# Altium PCB STM32F103ZGT6核心板.PcbDoc
Units mm, origin at the board's own origin, x right, y up, seen from the top; angles counter-clockwise.
Board outline 50 x 50 mm, 2 copper layers (Top Layer, Bottom Layer); 32 components, 119 nets, 326 pads, 217 vias.
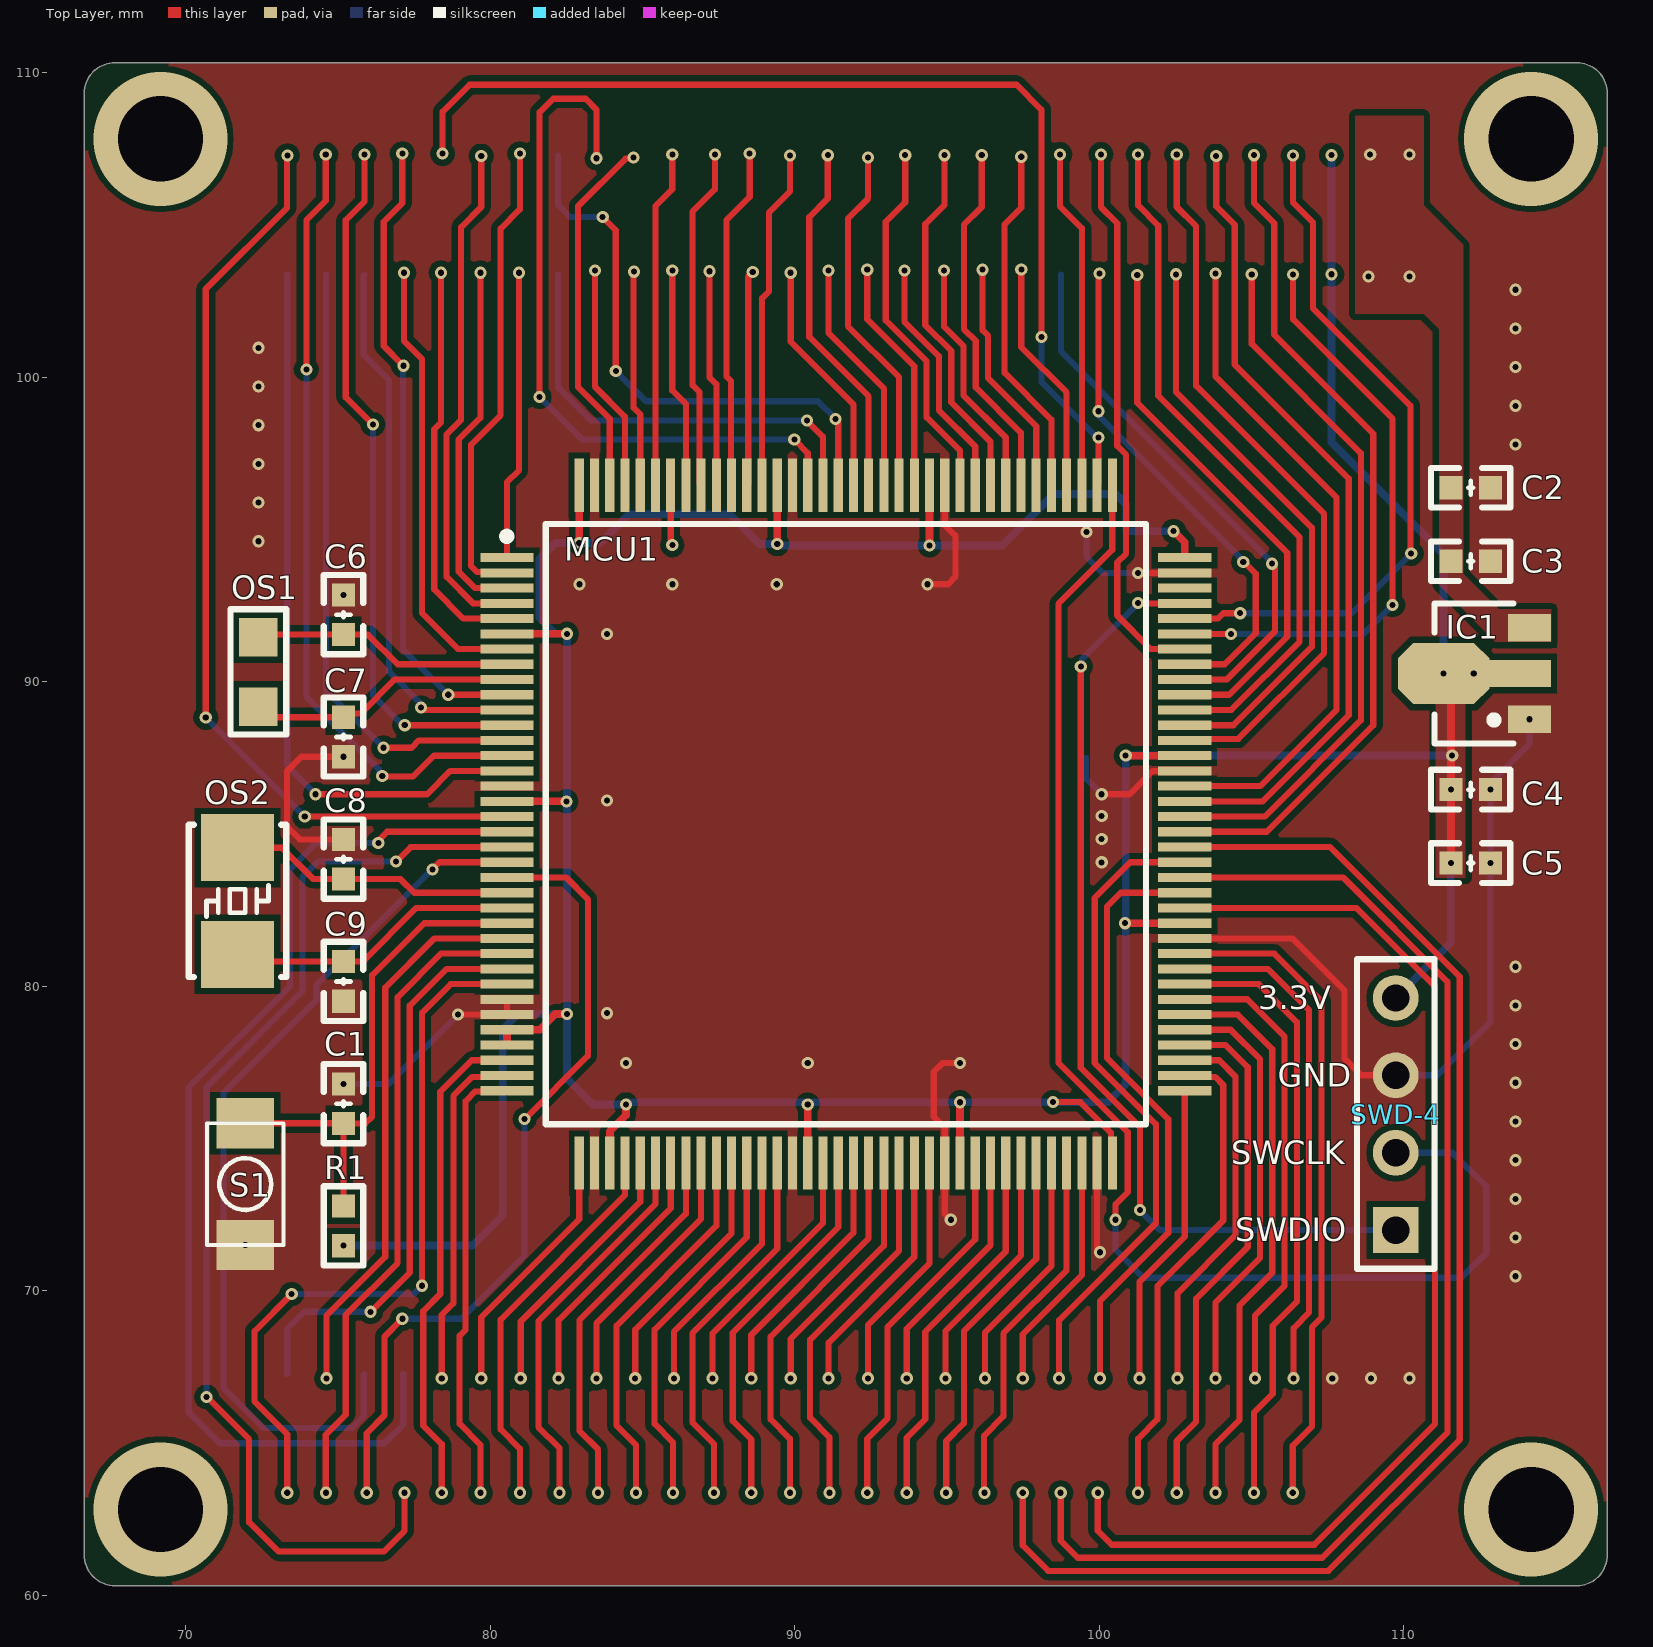
[diagram p0: Top Layer view]
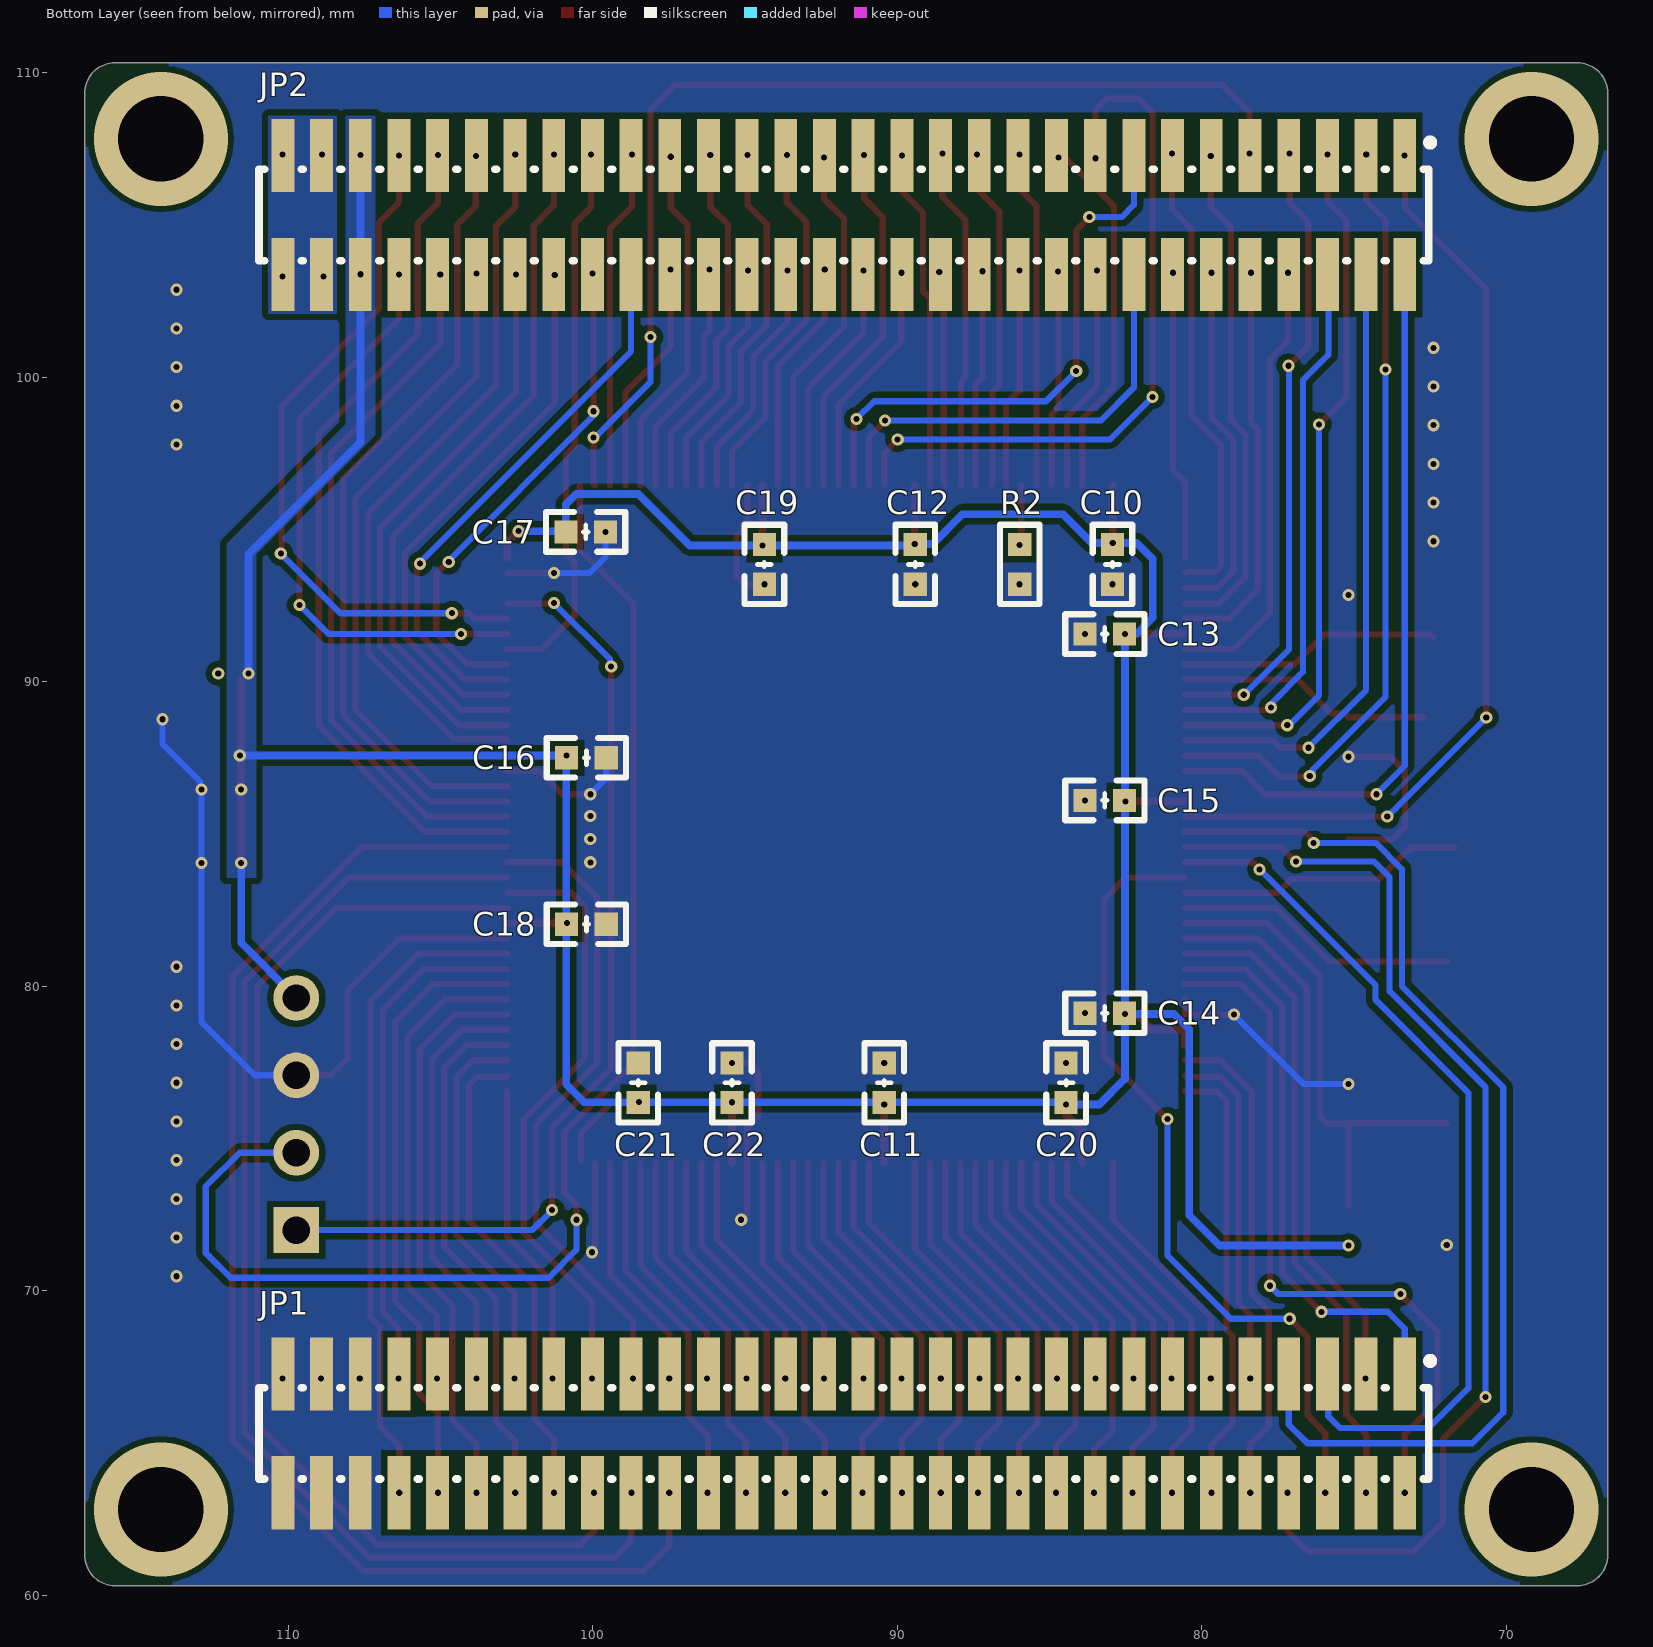
[diagram p1: Bottom Layer view, seen from below]
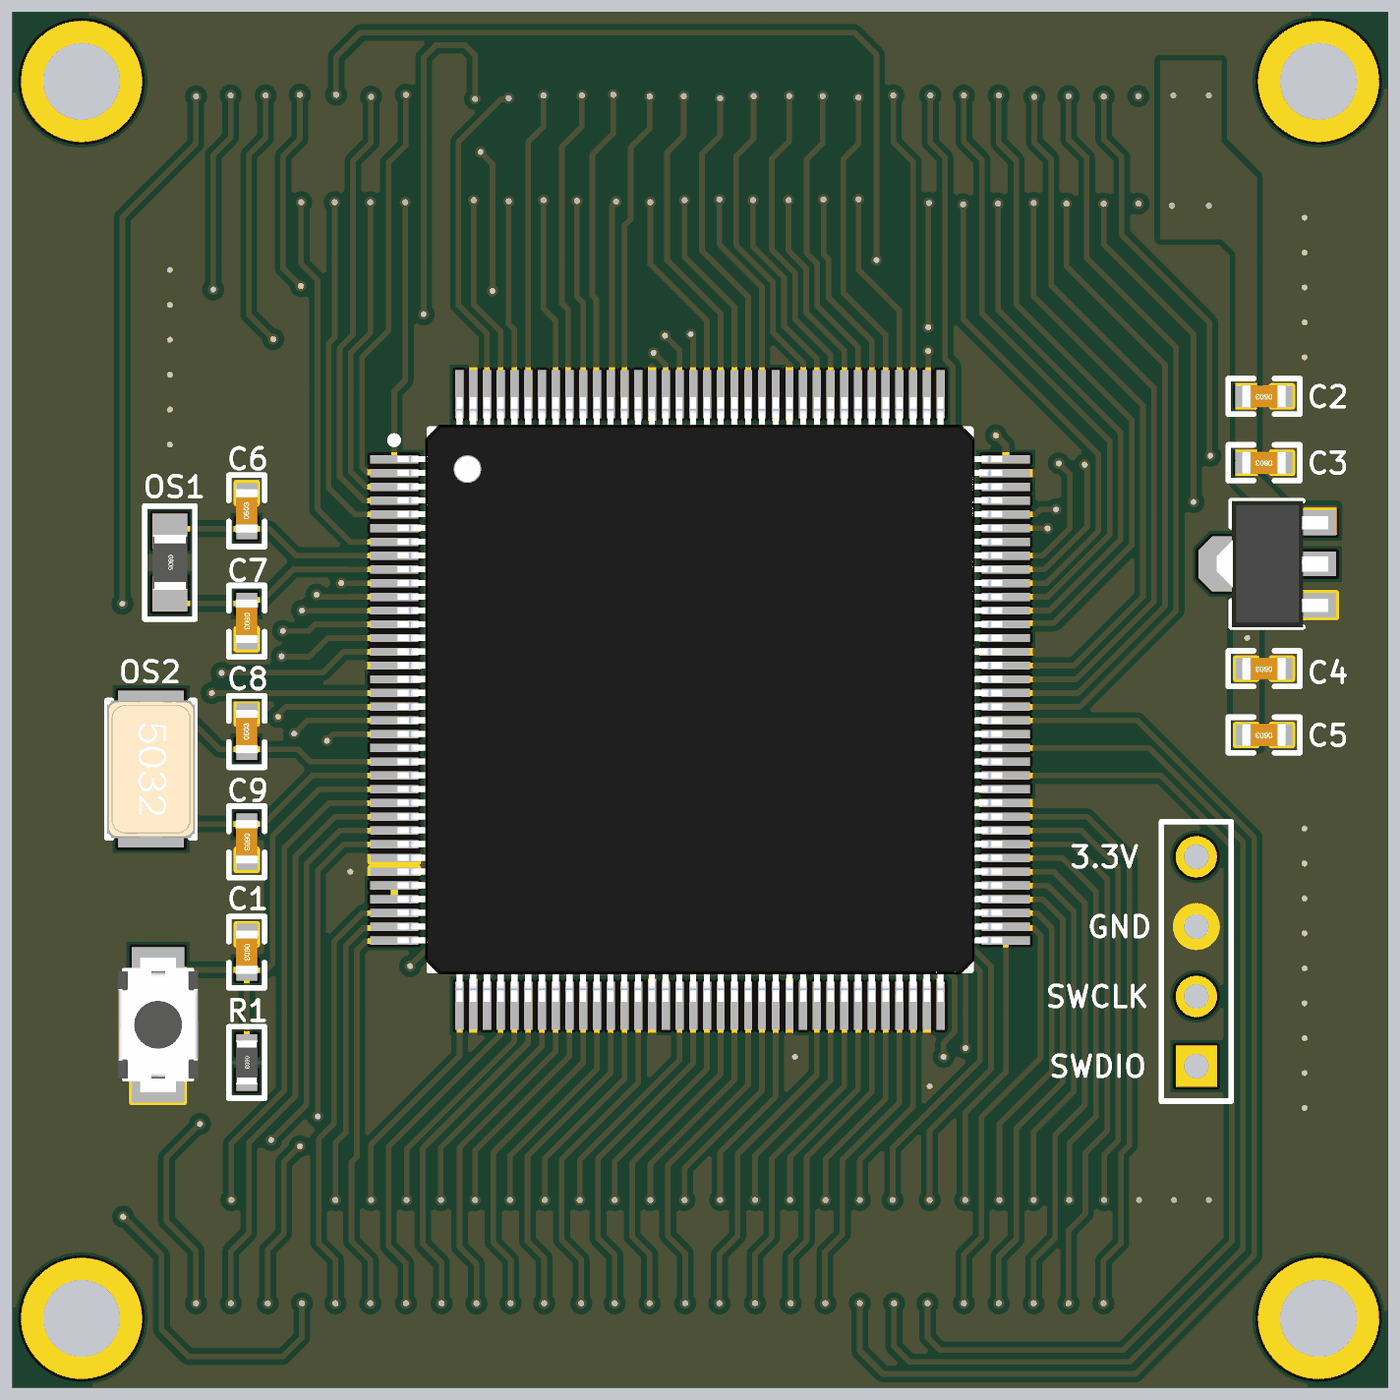
[diagram p2: 3D render of the assembled board from above, using the file's embedded part models]
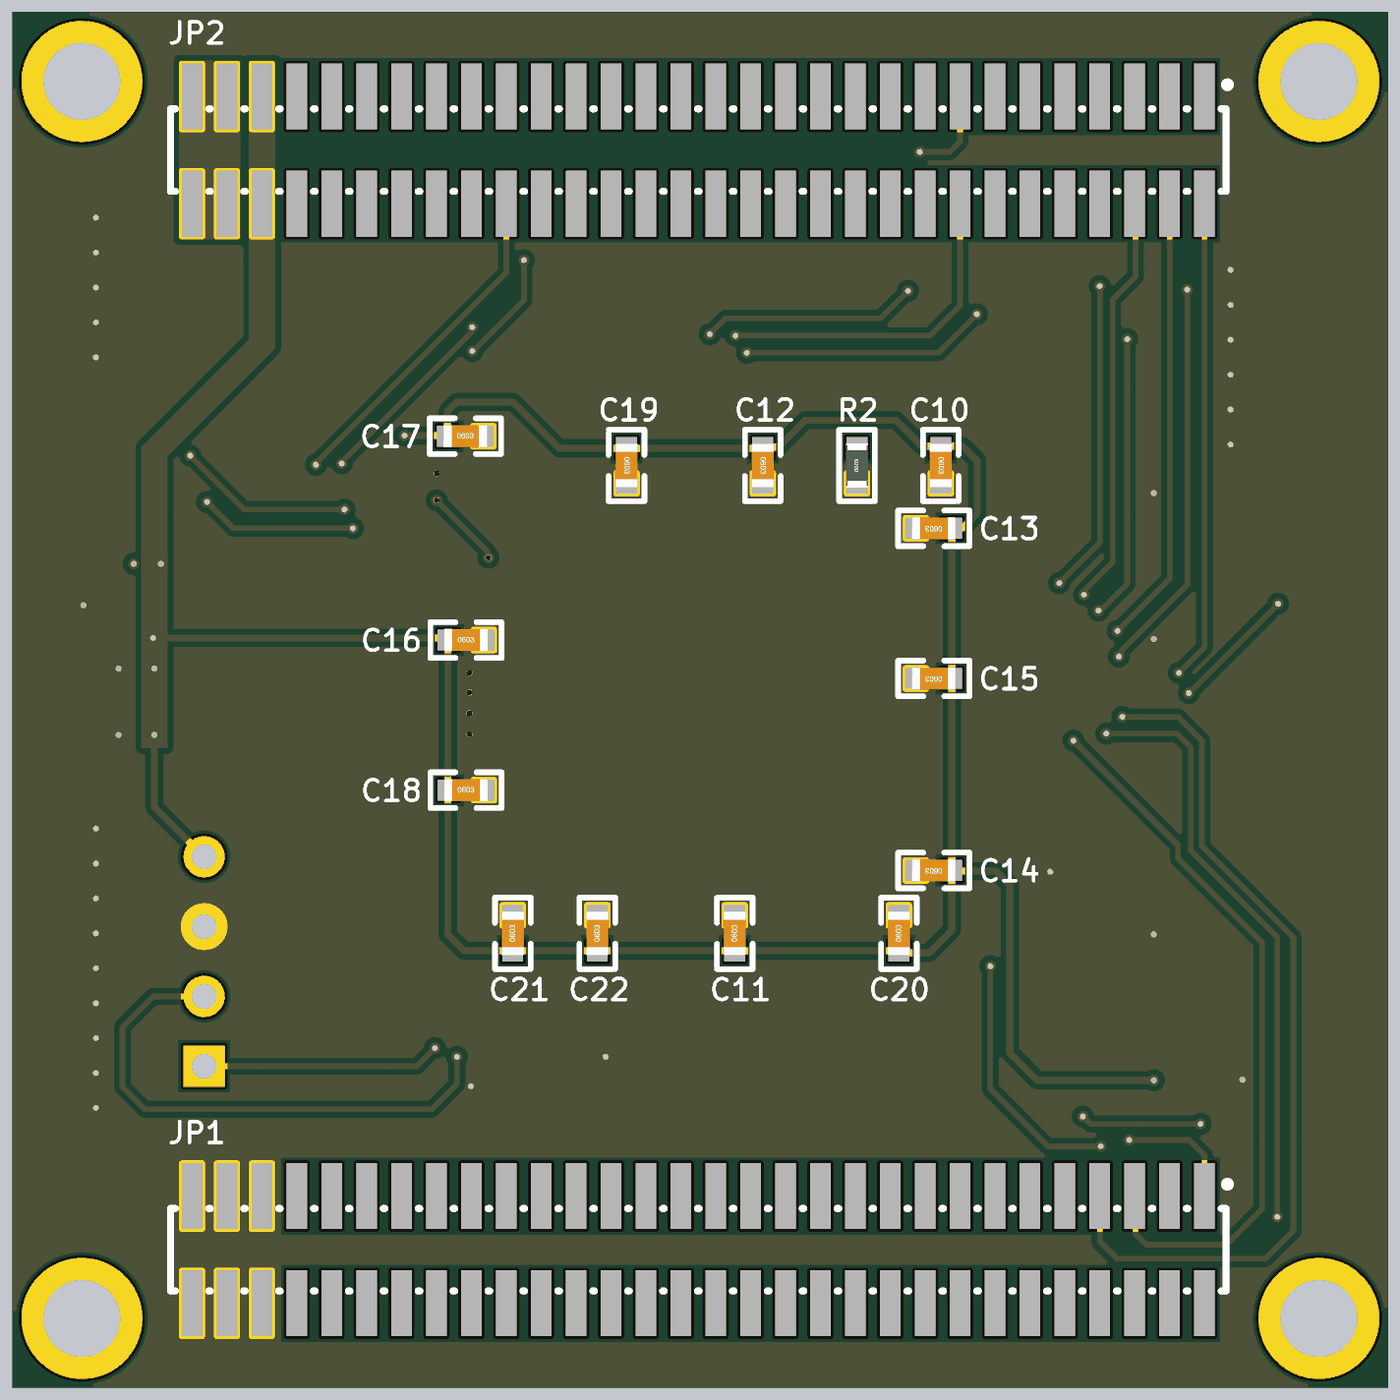
[diagram p3: 3D render of the assembled board from below, using the file's embedded part models]

## Layer stack, top to bottom
Top Solder: solder mask 0.0102, Solder Resist, Dk 3.5
Top Layer: signal copper 0.0356
Dielectric 1: dielectric 0.32, FR-4, Dk 4.8
Bottom Layer: signal copper 0.0356
Bottom Solder: solder mask 0.0102, Solder Resist, Dk 3.5

## Board outline
66.675,61.325 ccw(c67.675,61.325) 67.675,60.325 115.675,60.325 ccw(c115.675,61.325) 116.675,61.325 116.675,109.325 ccw(c115.675,109.325) 115.675,110.325 67.675,110.325 ccw(c67.675,109.325) 66.675,109.325

## Design rules (kind name [scope] priority, off if disabled: settings)
Clearance [All] p1: gap=0.2 ignorepadtopadclearanceinfootprint=FALSE
HoleSize [All] p1: absolutevalues=TRUE maxlimit=4 minlimit=0.025 maxpercent=80.000 minpercent=20.000
MinimumSolderMaskSliver [All] p1: minsoldermaskwidth=0.2
PolygonConnect [All] p1: connectstyle=Direct reliefconductorwidth=0.254 reliefentries=4 polygonreliefangle="90 Angle" airgapwidth=0.254
RoutingVias [All] p1: holewidth=0.711 width=1.27 viastyle="Through Hole" minholewidth=0.15 minwidth=0.25 maxholewidth=7.112 maxwidth=12.7
SilkToSilkClearance [All] p1 off: silktosilkclearance=0.254
SilkToSolderMaskClearance [IsPad] p1 off: minsilkscreentomaskgap=0.254 clearancetoexposedcopper=TRUE
SolderMaskExpansion [All] p1: expansion=0.102 istentingtop=FALSE
Width [All] p1: maxlimit=0.254 minlimit=0.203 preferedwidth=0.203
26 further rules are at their usual default settings.

## Components (designator, comment, footprint, x,y, rotation, side; value= is the part's Value field where it differs from the comment)
C1 "104" "C 0603_L" 75.184,76.149 r270 top
C2 "10uF" "C 0603_L" 112.192,96.368 r180 top
C3 "104" "C 0603_L" 112.192,93.955 r180 top
C4 "104" "C 0603_L" 112.192,86.462 r180 top
C5 "10uF" "C 0603_L" 112.192,84.049 r180 top
C6 "104" "C 0603_L" 75.184,92.202 r90 top
C7 "104" "C 0603_L" 75.184,88.189 r270 top
C8 "104" "C 0603_L" 75.184,84.176 r90 top
C9 "104" "C 0603_L" 75.184,80.162 r270 top
C10 "104" "C 0603_L" 82.931,93.853 r270 bottom
C11 "104" "C 0603_L" 90.425,76.835 r90 bottom
C12 "104" "C 0603_L" 89.408,93.853 r270 bottom
C13 "104" "C 0603_L" 83.185,91.567 r0 bottom
C14 "104" "C 0603_L" 83.185,79.121 r0 bottom
C15 "104" "C 0603_L" 83.185,86.106 r0 bottom
C16 "104" "C 0603_L" 100.203,87.503 r180 bottom
C17 "104" "C 0603_L" 100.228,94.92 r180 bottom
C18 "104" "C 0603_L" 100.203,82.042 r180 bottom
C19 "104" "C 0603_L" 94.361,93.853 r270 bottom
C20 "104" "C 0603_L" 84.455,76.835 r90 bottom
C21 "104" "C 0603_L" 98.5,76.835 r90 bottom
C22 "104" "C 0603_L" 95.425,76.835 r90 bottom
IC1 "AMS1117" SOT89 111.938,90.272 r90 top
JP1 "Header 2X30" HDR-SMD_60P-P1.27-V-M-R2-C30-LS5.8 91.753,65.325 r0 bottom
JP2 "Header 2X30" HDR-SMD_60P-P1.27-V-M-R2-C30-LS5.8 91.753,105.325 r0 bottom
MCU1 "STM32F103ZET6" F-QFP20x20-G144/Z24N 91.675,85.325 r0 top
OS1 "32.768K" "R 0805_M" 72.39,90.322 r270 top
OS2 "8M" "OSC 5032-2P" 71.704,82.804 r270 top
R1 "10K" "R 0603_L" 75.184,72.136 r270 top
R2 "1K" "R 0603_L" 85.979,93.853 r90 bottom
S1 "KEY" SWT3*4 71.958,73.508 r90 top
SWD-4 "Header 4" HDR1X4 109.728,72 r90 top

## Footprints (in the part's own frame and the unit in brackets; to place one, negate y for a bottom-side part, rotate by r counter-clockwise, add the part's x,y. Pads: shape width x height; smd on the part's side, far side on the other; paste and mask are expansions set on the pad)
"C 0603_L" [mil] "无极性贴片电容                                       淘宝ID:黄晶宝石"
  rect 30x30 smd: 1(-25.59,0) 2(25.59,0)
  silkscreen extent -51,-26 51,26, body extent -31,-16 31,16, height 32
F-QFP20x20-G144/Z24N [mm] "QFP; 144 Leads; Body 20 x 20 mm; Pitch 0.5 mm"
  rect 1.75x0.3 smd: 1(-11.125,8.75) 2(-11.125,8.25) 3(-11.125,7.75) 4(-11.125,7.25) 5(-11.125,6.75) 6(-11.125,6.25) 7(-11.125,5.75) 8(-11.125,5.25) 9(-11.125,4.75) 10(-11.125,4.25) 11(-11.125,3.75) 12(-11.125,3.25) 13(-11.125,2.75) 14(-11.125,2.25) 15(-11.125,1.75) 16(-11.125,1.25) 17(-11.125,0.75) 18(-11.125,0.25) 19(-11.125,-0.25) 20(-11.125,-0.75) 21(-11.125,-1.25) 22(-11.125,-1.75) 23(-11.125,-2.25) 24(-11.125,-2.75) 25(-11.125,-3.25) 26(-11.125,-3.75) 27(-11.125,-4.25) 28(-11.125,-4.75) 29(-11.125,-5.25) 30(-11.125,-5.75) 31(-11.125,-6.25) 32(-11.125,-6.75) 33(-11.125,-7.25) 34(-11.125,-7.75) 35(-11.125,-8.25) 36(-11.125,-8.75) 73(11.125,-8.75) 74(11.125,-8.25) 75(11.125,-7.75) 76(11.125,-7.25) 77(11.125,-6.75) 78(11.125,-6.25) 79(11.125,-5.75) 80(11.125,-5.25) 81(11.125,-4.75) 82(11.125,-4.25) 83(11.125,-3.75) 84(11.125,-3.25) 85(11.125,-2.75) 86(11.125,-2.25) 87(11.125,-1.75) 88(11.125,-1.25) 89(11.125,-0.75) 90(11.125,-0.25) 91(11.125,0.25) 92(11.125,0.75) 93(11.125,1.25) 94(11.125,1.75) 95(11.125,2.25) 96(11.125,2.75) 97(11.125,3.25) 98(11.125,3.75) 99(11.125,4.25) 100(11.125,4.75) 101(11.125,5.25) 102(11.125,5.75) 103(11.125,6.25) 104(11.125,6.75) 105(11.125,7.25) 106(11.125,7.75) 107(11.125,8.25) 108(11.125,8.75)
  rect 0.3x1.75 smd: 37(-8.75,-11.125) 38(-8.25,-11.125) 39(-7.75,-11.125) 40(-7.25,-11.125) 41(-6.75,-11.125) 42(-6.25,-11.125) 43(-5.75,-11.125) 44(-5.25,-11.125) 45(-4.75,-11.125) 46(-4.25,-11.125) 47(-3.75,-11.125) 48(-3.25,-11.125) 49(-2.75,-11.125) 50(-2.25,-11.125) 51(-1.75,-11.125) 52(-1.25,-11.125) 53(-0.75,-11.125) 54(-0.25,-11.125) 55(0.25,-11.125) 56(0.75,-11.125) 57(1.25,-11.125) 58(1.75,-11.125) 59(2.25,-11.125) 60(2.75,-11.125) 61(3.25,-11.125) 62(3.75,-11.125) 63(4.25,-11.125) 64(4.75,-11.125) 65(5.25,-11.125) 66(5.75,-11.125) 67(6.25,-11.125) 68(6.75,-11.125) 69(7.25,-11.125) 70(7.75,-11.125) 71(8.25,-11.125) 72(8.75,-11.125) 109(8.75,11.125) 110(8.25,11.125) 111(7.75,11.125) 112(7.25,11.125) 113(6.75,11.125) 114(6.25,11.125) 115(5.75,11.125) 116(5.25,11.125) 117(4.75,11.125) 118(4.25,11.125) 119(3.75,11.125) 120(3.25,11.125) 121(2.75,11.125) 122(2.25,11.125) 123(1.75,11.125) 124(1.25,11.125) 125(0.75,11.125) 126(0.25,11.125) 127(-0.25,11.125) 128(-0.75,11.125) 129(-1.25,11.125) 130(-1.75,11.125) 131(-2.25,11.125) 132(-2.75,11.125) 133(-3.25,11.125) 134(-3.75,11.125) 135(-4.25,11.125) 136(-4.75,11.125) 137(-5.25,11.125) 138(-5.75,11.125) 139(-6.25,11.125) 140(-6.75,11.125) 141(-7.25,11.125) 142(-7.75,11.125) 143(-8.25,11.125) 144(-8.75,11.125)
  silkscreen extent -11.25,-9.85 9.85,9.85, body extent -11.01,-10.99 10.99,11.01, height 1.63
HDR1X4 [mm] "Connector; Header; 4 Position"
  rect 1.5x1.5 hole 0.9: 1(0,0)
  round 1.5 hole 0.9: 2(2.54,0) 3(5.08,0) 4(7.62,0)
  silkscreen extent -1.27,-1.27 8.89,1.27
HDR-SMD_60P-P1.27-V-M-R2-C30-LS5.8 [mm]
  rect 0.75x2.4 smd: 1(-18.415,-1.95) 2(-18.415,1.95) 3(-17.145,-1.95) 4(-17.145,1.95) 5(-15.875,-1.95) 6(-15.875,1.95) 7(-14.605,-1.95) 8(-14.605,1.95) 9(-13.335,-1.95) 10(-13.335,1.95) 11(-12.065,-1.95) 12(-12.065,1.95) 13(-10.795,-1.95) 14(-10.795,1.95) 15(-9.525,-1.95) 16(-9.525,1.95) 17(-8.255,-1.95) 18(-8.255,1.95) 19(-6.985,-1.95) 20(-6.985,1.95) 21(-5.715,-1.95) 22(-5.715,1.95) 23(-4.445,-1.95) 24(-4.445,1.95) 25(-3.175,-1.95) 26(-3.175,1.95) 27(-1.905,-1.95) 28(-1.905,1.95) 29(-0.635,-1.95) 30(-0.635,1.95) 31(0.635,-1.95) 32(0.635,1.95) 33(1.905,-1.95) 34(1.905,1.95) 35(3.175,-1.95) 36(3.175,1.95) 37(4.445,-1.95) 38(4.445,1.95) 39(5.715,-1.95) 40(5.715,1.95) 41(6.985,-1.95) 42(6.985,1.95) 43(8.255,-1.95) 44(8.255,1.95) 45(9.525,-1.95) 46(9.525,1.95) 47(10.795,-1.95) 48(10.795,1.95) 49(12.065,-1.95) 50(12.065,1.95) 51(13.335,-1.95) 52(13.335,1.95) 53(14.605,-1.95) 54(14.605,1.95) 55(15.875,-1.95) 56(15.875,1.95) 57(17.145,-1.95) 58(17.145,1.95) 59(18.415,-1.95) 60(18.415,1.95)
  silkscreen extent -19.35,-2.49 19.2,1.5
"OSC 5032-2P" [mm] "5mm*3.2mm*0.8mm(长*宽*高)                  淘宝ID:黄晶宝石"
  rect 2.2x2.4 smd: 1(-1.75,0) 2(1.75,0)
  silkscreen extent -2.5,-1.6 2.5,1.6, body extent -2.5,-1.6 2.5,1.6, height 0.86
"R 0603_L" [mil] "1/10W贴片电阻                 淘宝ID:黄晶宝石"
  rect 30x30 smd: 1(-25.59,0) 2(25.59,0)
  silkscreen extent -51,-26 51,26, body extent -31,-16 32,16, height 16
"R 0805_M" [mil] "1/8W贴片电阻"
  rect 50x50 smd: 1(-45,0) 2(45,0)
  silkscreen extent -81,-36 81,36, body extent -39,-25 39,25, height 20
SOT89 [mm] "SOT89, 3-Leads, Body 4.50x2.45mm, Pitch 1.50mm, Lead Span 4.1mm, IPC Medium Density"
  rect 0.9x1.4 smd: 1(-1.5,-2.181) 3(1.5,-2.181)
  oct 2x3 smd: 2(0,0.635)
  rect 0.9x3 smd: 2(0,-1.381)
  silkscreen extent -2.3,-1.66 2.3,0.94, body extent -2.3,-2.58 2.3,1.47, height 1.6
SWT3*4 [mm]
  rect 1.65x1.9 smd: 1(-2,0) 2(2,0)
  silkscreen extent -2,-1.25 2,1.25, body extent -2.45,-1.45 2.45,1.45, height 2

## Part data
C1 C2 C3 C4 C5 C6 C7 C8 C9: library part Cap1
C10 C11 C12 C13 C14 C15 C16 C17 C18 C19 C20 C21 C22: library part CAP, "Capacitor"
IC1: library part CJA1117
JP1 JP2: library part "Header 30X2", "30*2P接插件", BOM名称=20*2P接插件, 学习资源=https://shop463601444.taobao.com, 版权归属="封装库来自淘宝 ID：黄晶宝石"
OS1 OS2: library part 晶振
  OS1: vaule=32.768K
  OS2: vaule=8M
R1 R2: library part Res
SWD-4: "Header, 4-Pin", LatestRevisionDate=17-Jul-2002, LatestRevisionNote="Re-released for DXP Platform.", Publisher="Altium Limited"

## Via types
v1: diameter 0.4/0.4 (per signal layer), hole 0.2, Top Layer to Bottom Layer, 213 vias
v2: diameter 4.4, hole 2.8, Top Layer to Bottom Layer, 4 vias

## Nets (pads, with @x,y where several pads share a name; then routed paths per layer and width w, separated by ;. In a path a pad name is that pad's centre, name@x,y a point inside that pad or via, vN(x,y) a via of type N, cw(c..) or ccw(c..) an arc to the next point about the centre after c; other vN are vias at no path point)
3.3V: C4.2 C5.2 C10.1 C11.1 C12.1 C13.1 C14.1 C15.1 C16.1 C17.1 C18.1 C19.1 C20.1 C21.1 C22.1 IC1.2 JP2.55 JP2.56 MCU1.6 MCU1.17 MCU1.32 MCU1.33 MCU1.39 MCU1.52 MCU1.62 MCU1.72 MCU1.84 MCU1.95 MCU1.108 MCU1.121 MCU1.131 MCU1.144 R1.2 SWD-4.4 | length 152
  Top Layer w0.203: v1(98.476,76.2) 99.377,76.2 100.377,75.2 MCU1.72@100.377,74.248
  Top Layer w0.254: MCU1.33 MCU1.32 81.623,78.575 82.144,79.096 v1(82.525,79.096) ; MCU1.17 v1(82.505,86.075) ; MCU1.6 v1(82.517,91.575) ; v1(82.925,94.558) MCU1.144 ; MCU1.39 83.931,74.206 83.931,75.244 84.455,75.768 v1(84.455,76.124) ; v1(89.425,94.522) MCU1.131 ; MCU1.52 v1(90.425,76.123) ; v1(94.425,94.476) MCU1.121 ; MCU1.62 v1(95.425,76.197) ; v1(100.846,82.075) MCU1.84 ; v1(100.863,87.579) 100.868,87.575 MCU1.95 ; v1(102.438,94.945) 102.8,94.583 MCU1.108 ; C5.2 C4.2 IC1.2@111.542,90.033
  Bottom Layer w0.254: v1(75.18,71.49) 79.415,71.49 80.416,72.492 80.416,78.588 80.924,79.096 v1(82.525,79.096) ; v1(82.517,91.575) 82.136,91.575 81.61,92.1 81.61,94.031 82.138,94.558 v1(82.925,94.558) 83.611,94.558 84.557,95.504 87.859,95.504 88.841,94.522 v1(89.425,94.522) ; C13.1@82.525,91.567 v1(82.525,79.096) ; v1(84.455,76.124) 83.363,76.124 82.525,76.962 v1(82.525,79.096) ; C20.1@84.531,76.2 v1(98.476,76.2) 100.279,76.2 100.863,76.784 v1(100.863,87.579) v1(111.582,87.579) ; C12.1@89.471,94.476 v1(94.425,94.476) 96.813,94.476 98.501,96.164 100.533,96.164 100.878,95.819 C17.1 ; C17.1@100.904,94.945 v1(102.438,94.945) ; v1(107.62,107.29) 107.62,97.866 111.299,94.187 v1(111.299,90.276) ; SWD-4.4 111.538,81.43 v1(111.538,84.053)
  other v1: 111.538,86.466 112.291,90.276 107.623,103.379
5V: C2.2 C3.2 IC1.3 JP2.57 JP2.58 JP2.59 JP2.60
  other v1: 108.839,103.302 110.185,103.302 108.89,107.315 110.185,107.315
BOOT0: MCU1.138 R2.2 | length 1.8
  Top Layer w0.203: v1@85.925,94.669 MCU1.138
  other v1: 85.979,94.488
GND: C1.1 C2.1 C3.1 C4.1 C5.1 C6.2 C7.2 C8.2 C9.2 C10.2 C11.2 C12.2 C13.2 C14.2 C15.2 C16.2 C17.2 C18.2 C19.2 C20.2 C21.2 C22.2 IC1.1 JP1.55 JP1.56 JP1.57 JP1.58 JP1.59 JP1.60 MCU1.16 MCU1.30 MCU1.31 MCU1.38 MCU1.51 MCU1.61 MCU1.71 MCU1.83 MCU1.94 MCU1.107 MCU1.120 MCU1.130 MCU1.143 R2.1 S1.1 SWD-4.3 | length 59
  Top Layer w0.203: C8.2 73.747,84.826 73.33,85.242 73.33,87.071 73.797,87.539 v1(75.184,87.539) ; v1(78.948,79.075) MCU1.31 MCU1.30 ; v1(94.361,93.203) 95.032,93.203 95.275,93.447 95.275,94.793 94.925,95.143 MCU1.120 ; v1(95.123,72.339) 94.925,72.537 MCU1.61 94.925,75.357 94.564,75.717 94.564,77.191 94.859,77.485 v1(95.425,77.485) ; MCU1.71 99.925,71.373 v1(100.025,71.272) ; v1(100.076,86.309) 100.99,86.309 101.753,87.072 102.797,87.072 MCU1.94 ; v1(101.27,93.574) 102.799,93.574 MCU1.107 ; MCU1.83 106.334,81.575 108.052,79.858 108.052,77.622 108.594,77.08 SWD-4.3
  Bottom Layer w0.203: v1(75.184,76.799) 76.672,76.799 v1(78.948,79.075) ; C16.2 99.553,86.832 v1(100.076,86.309) ; v1(99.578,94.92) 99.578,94.097 100.101,93.574 v1(101.27,93.574) ; SWD-4.3 111.091,77.08 112.842,78.831 v1(112.842,84.049) v1(112.842,86.462) 112.88,86.499 112.88,86.718 114.119,87.957 v1(114.119,88.772)
  other v1: 107.645,67.132 108.915,67.132 110.185,67.132 113.665,70.485 71.958,71.508 113.665,71.755 113.665,73.025 113.665,74.295 113.665,75.565 113.665,76.835 84.455,77.485 90.425,77.485 113.665,78.105 83.835,79.121 113.665,79.375 113.665,80.645 100.076,84.074 100.076,84.836 100.076,85.598 83.835,86.106 83.835,91.567 75.184,92.852 82.931,93.203 85.979,93.203 89.408,93.203 72.39,94.615 72.39,95.885 72.39,97.155 113.665,97.79 72.39,98.425 113.665,99.06 72.39,99.695 113.665,100.33 72.39,100.965 113.665,101.6 113.665,102.87
NRST: C1.2 MCU1.25 R1.1 S1.2 | length 16.7
  Top Layer w0.203: S1.2 C1.2@75.176,75.508 ; R1.1 C1.2 75.906,75.499 76.124,75.717 76.124,80.366 77.833,82.075 MCU1.25
OSC_8M_IN: C8.1 MCU1.23 OS2.1 | length 9.5
  Top Layer w0.203: OS2.1 73.155,84.554 74.183,83.526 C8.1 77.053,83.526 77.504,83.075 MCU1.23
OSC_8M_OUT: C9.1 MCU1.24 OS2.2 | length 9.3
  Top Layer w0.203: OS2.2@71.946,80.812 C9.1 75.809,80.812 77.571,82.575 MCU1.24
OSC_32K_IN: C6.1 MCU1.8 OS1.1 | length 8.6
  Top Layer w0.203: OS1.1 72.477,91.552 C6.1 75.986,91.552 76.963,90.575 MCU1.8
OSC_32K_OUT: C7.1 MCU1.9 OS1.2 | length 8.3
  Top Layer w0.203: OS1.2@72.731,88.839 C7.1 75.304,88.959 75.751,88.959 76.869,90.077 78.832,90.077 78.833,90.075 MCU1.9
PA0: JP1.10 MCU1.34 | length 16.3
  Top Layer w0.203: v1(78.41,63.375) 78.41,64.973 77.8,65.583 77.8,69.342 78.359,69.901 78.359,76.542 79.392,77.575 MCU1.34
PA1: JP1.9 MCU1.35 | length 11.5
  Top Layer w0.203: v1(78.41,67.132) 78.41,69.215 78.791,69.596 78.791,76.403 79.414,77.027 80.502,77.027 MCU1.35
PA2: JP1.12 MCU1.36 | length 14.7
  Top Layer w0.203: v1(79.68,63.375) 79.68,64.948 78.994,65.634 78.994,68.529 79.194,68.729 79.194,76.236 79.51,76.552 80.527,76.552 MCU1.36
PA3: JP1.11 MCU1.37 | length 8.4
  Top Layer w0.203: v1(79.705,67.132) 79.705,69.139 82.925,72.359 MCU1.37
PA4: JP1.14 MCU1.40 | length 12.8
  Top Layer w0.203: v1(80.975,63.375) 80.975,64.821 80.34,65.456 80.34,69.063 84.425,73.147 MCU1.40
PA5: JP1.13 MCU1.41 | length 8.7
  Top Layer w0.203: v1(81.001,67.132) 81.001,68.998 84.925,72.922 MCU1.41
PA6: JP1.16 MCU1.42 | length 12.7
  Top Layer w0.203: v1(82.271,63.375) 82.271,64.846 81.585,65.532 81.585,69.012 85.425,72.852 MCU1.42
PA7: JP1.15 MCU1.43 | length 8.6
  Top Layer w0.203: v1(82.245,67.132) 82.245,69.037 85.925,72.717 MCU1.43
PA8: JP2.42 MCU1.100 | length 18.3
  Top Layer w0.203: MCU1.100 104.189,90.075 105.766,91.652 105.766,93.827 105.715,93.878 v1(105.664,93.878)
  Bottom Layer w0.203: JP2.42 98.738,100.856 105.664,93.929 v1(105.664,93.878)
PA9: JP2.44 MCU1.101 | length 16.8
  Top Layer w0.203: v1(99.974,98.882) 99.974,103.378 v1(100,103.403) ; MCU1.101 104.118,90.575 105.131,91.587 105.131,93.548 104.75,93.929 v1(104.724,93.929)
  Bottom Layer w0.203: v1(99.974,98.882) 99.974,98.728 104.773,93.929 v1(104.724,93.929)
PA10: JP2.43 MCU1.102 | length 18.3
  Top Layer w0.203: v1(100.051,107.315) 100.051,105.588 100.584,105.054 100.584,97.743 100.877,97.45 100.877,94.21 100.584,93.918 100.584,92.177 101.686,91.075 MCU1.102
PA11: JP2.54 MCU1.103 | length 19.4
  Top Layer w0.203: MCU1.103 102.808,91.567 v1(104.318,91.567) ; v1(106.358,103.375) 106.358,101.897 109.626,98.628 v1(109.626,92.525)
  Bottom Layer w0.203: v1(104.318,91.567) 108.668,91.567 v1(109.626,92.525)
PA12: JP2.53 MCU1.104 | length 22.9
  Top Layer w0.203: MCU1.104 103.886,92.075 104.064,92.253 v1(104.623,92.253) ; v1(106.358,107.275) 106.358,105.732 107.01,105.08 107.01,102.26 110.211,99.06 v1@110.211,94.259
  Bottom Layer w0.203: v1(104.623,92.253) 108.28,92.253 v1(110.236,94.209)
PA15: JP2.9 MCU1.110 | length 35.1
  Top Layer w0.203: v1(78.435,107.34) 78.435,108.712 79.324,109.601 97.282,109.601 98.095,108.788 v1(98.095,101.321) ; MCU1.110 99.973,96.498 99.973,97.45 99.974,97.451 v1(99.974,98.019) v1@99.974,97.861
  Bottom Layer w0.203: v1(98.095,101.321) 98.095,99.847 99.924,98.019 v1(99.974,98.019)
PB0: JP1.20 MCU1.46 | length 12.4
  Top Layer w0.203: v1(84.785,63.375) 84.785,64.948 84.15,65.583 84.15,68.859 87.425,72.134 MCU1.46
PB1: JP1.19 MCU1.47 | length 8.4
  Top Layer w0.203: v1(84.76,67.132) 84.76,68.732 87.925,71.898 MCU1.47
PB2: JP1.22 MCU1.48 | length 12.3
  Top Layer w0.203: v1(86.004,63.375) 86.004,65.024 85.395,65.634 85.395,68.732 88.425,71.763 MCU1.48
PB3: JP2.26 MCU1.133 | length 7.1
  Top Layer w0.203: MCU1.133 88.473,96.498 88.473,103.307 v1(88.621,103.454)
PB4: JP2.25 MCU1.134 | length 11.3
  Top Layer w0.203: MCU1.134 87.902,96.473 87.902,99.88 87.757,100.025 87.757,105.156 88.519,105.918 v1(88.519,107.34)
PB5: JP2.24 MCU1.135 | length 7.1
  Top Layer w0.203: v1(87.198,103.48) 87.198,100 87.425,99.773 MCU1.135
PB6: JP2.23 MCU1.136 | length 11.3
  Top Layer w0.203: MCU1.136 86.877,96.498 86.877,99.509 86.647,99.739 86.647,105.443 87.376,106.172 v1(87.376,107.315)
PB7: JP2.22 MCU1.137 | length 7.2
  Top Layer w0.203: v1(85.979,103.505) 85.979,99.568 86.425,99.122 MCU1.137
PB8: JP2.21 MCU1.139 | length 11.1
  Top Layer w0.203: MCU1.139 85.425,105.618 85.979,106.172 v1(85.979,107.315)
PB9: JP2.20 MCU1.140 | length 7.1
  Top Layer w0.203: v1@84.709,103.505 84.709,98.995 84.925,98.779 MCU1.140
  other v1: 84.717,103.464
PB10: JP1.38 MCU1.69 | length 11.9
  Top Layer w0.203: v1@96.215,63.375 96.215,65.253 96.85,65.888 96.85,68.605 98.925,70.68 MCU1.69
  other v1: 96.231,63.375
PB11: JP1.39 MCU1.70 | length 7.9
  Top Layer w0.203: v1(97.485,67.132) 97.485,68.58 99.425,70.52 MCU1.70
PB12: JP1.45 MCU1.73 | length 10.1
  Top Layer w0.203: v1(101.321,67.132) 101.321,70.307 102.8,71.787 MCU1.73
PB13: JP1.46 MCU1.74 | length 15.9
  Top Layer w0.203: v1(101.27,63.375) 101.27,65.151 101.905,65.786 101.905,70.155 104.064,72.314 104.064,76.763 103.8,77.027 102.848,77.027 MCU1.74
PB14: JP1.47 MCU1.75 | length 12.6
  Top Layer w0.203: v1(102.565,67.132) 102.565,69.926 104.467,71.828 104.467,77.041 103.933,77.575 MCU1.75
PB15: JP1.48 MCU1.76 | length 17.3
  Top Layer w0.203: v1(102.54,63.375) 102.54,65.075 103.175,65.71 103.175,69.748 104.87,71.444 104.87,77.349 104.145,78.075 MCU1.76
PC0: JP1.3 MCU1.26 | length 18.3
  Top Layer w0.203: v1(74.625,67.132) 74.625,69.19 76.556,71.12 76.556,79.959 78.171,81.575 MCU1.26
PC1: JP1.4 MCU1.27 | length 21.4
  Top Layer w0.203: v1@74.6,63.375 74.6,65.278 75.26,65.938 75.26,69.215 76.959,70.914 76.959,79.651 78.383,81.075 MCU1.27
  other v1: 74.608,63.375
PC2: JP1.1 MCU1.28 | length 18.7
  Top Layer w0.203: v1(76.073,69.317) 77.362,70.606 77.362,79.369 78.568,80.575 MCU1.28
  Bottom Layer w0.203: JP1.1 73.338,68.766 73.889,69.317 v1(76.073,69.317)
PC3: JP1.2 MCU1.29 | length 24
  Top Layer w0.203: v1(73.338,63.375) 73.338,65.296 72.263,66.37 72.263,68.682 v1(73.482,69.901) ; v1(77.765,70.171) 77.765,79.137 78.703,80.075 MCU1.29
  Bottom Layer w0.203: v1(73.482,69.901) 77.495,69.901 v1(77.765,70.171)
PC4: JP1.18 MCU1.44 | length 12.5
  Top Layer w0.203: v1(83.541,63.375) 83.541,64.795 82.931,65.405 82.931,69.037 86.425,72.531 MCU1.44
PC5: JP1.17 MCU1.45 | length 8.5
  Top Layer w0.203: v1(83.49,67.132) 83.49,68.936 86.925,72.371 MCU1.45
PC6: JP2.47 MCU1.96 | length 24.1
  Top Layer w0.203: v1(102.54,107.315) 102.54,105.588 103.175,104.953 103.175,99.72 107.379,95.517 107.379,90.945 104.557,88.123 102.848,88.123 MCU1.96
PC7: JP2.48 MCU1.97 | length 19.3
  Top Layer w0.203: v1(102.514,103.378) 102.514,99.517 106.975,95.056 106.975,91.151 104.399,88.575 MCU1.97
PC8: JP2.45 MCU1.98 | length 22.9
  Top Layer w0.203: v1(101.27,107.315) 101.27,105.639 101.93,104.978 101.93,99.39 106.572,94.748 106.572,91.318 104.329,89.075 MCU1.98
PC9: JP2.46 MCU1.99 | length 18.1
  Top Layer w0.203: v1(101.244,103.353) 101.244,99.162 106.169,94.237 106.169,91.485 104.259,89.575 MCU1.99
PC10: JP2.41 MCU1.111 | length 11.2
  Top Layer w0.203: v1(98.704,107.315) 98.704,105.613 99.425,104.893 MCU1.111
PC11: JP2.40 MCU1.112 | length 7.7
  Top Layer w0.203: v1(97.438,103.533) 97.438,100.987 98.925,99.5 MCU1.112
PC12: JP2.39 MCU1.113 | length 11.7
  Top Layer w0.203: v1(97.434,107.239) 97.434,105.562 96.886,105.014 96.886,100.142 98.425,98.603 MCU1.113
PC13: JP2.8 MCU1.7 | length 14.7
  Top Layer w0.203: v1(77.165,103.429) 77.165,101.194 77.761,100.598 77.761,92.267 78.953,91.075 MCU1.7
PD0: JP2.38 MCU1.114 | length 7.8
  Top Layer w0.203: v1(96.164,103.53) 96.164,101.541 96.344,101.362 96.344,99.972 97.925,98.392 MCU1.114
PD1: JP2.37 MCU1.115 | length 11.9
  Top Layer w0.203: v1(96.139,107.29) 96.139,105.588 95.555,105.004 95.555,101.581 95.941,101.195 95.941,99.664 97.425,98.18 MCU1.115
PD2: JP2.36 MCU1.116 | length 7.9
  Top Layer w0.203: v1(94.894,103.505) 94.894,101.671 95.538,101.028 95.538,99.407 96.925,98.02 MCU1.116
PD3: JP2.35 MCU1.117 | length 12
  Top Layer w0.203: v1(94.92,107.29) 94.92,105.664 94.285,105.029 94.285,101.71 95.135,100.861 95.135,99.175 96.425,97.885 MCU1.117
PD4: JP2.34 MCU1.118 | length 8
  Top Layer w0.203: v1(93.599,103.505) 93.599,101.826 94.731,100.694 94.731,98.918 95.925,97.725 MCU1.118
PD5: JP2.33 MCU1.119 | length 12.1
  Top Layer w0.203: v1(93.624,107.29) 93.624,105.74 92.989,105.105 92.989,101.865 94.328,100.527 94.328,98.686 95.425,97.59 MCU1.119
PD6: JP2.32 MCU1.122 | length 7.7
  Top Layer w0.203: v1(92.38,103.53) 92.38,101.905 93.925,100.36 MCU1.122
PD7: JP2.31 MCU1.123 | length 11.7
  Top Layer w0.203: v1(92.405,107.213) 92.405,105.867 91.745,105.207 91.745,101.676 93.425,99.996 MCU1.123
PD8: JP1.49 MCU1.77 | length 14
  Top Layer w0.203: MCU1.77 104.305,78.575 105.274,77.606 105.274,71.085 103.81,69.621 v1(103.81,67.132)
PD9: JP1.50 MCU1.78 | length 18.7
  Top Layer w0.203: MCU1.78 104.542,79.075 105.677,77.94 105.677,70.599 104.597,69.52 104.597,65.761 103.81,64.973 v1(103.81,63.375)
PD10: JP1.51 MCU1.79 | length 15.5
  Top Layer w0.203: MCU1.79 104.854,79.575 106.08,78.349 106.08,70.164 105.105,69.19 v1@105.105,67.081
  other v1: 105.105,67.132
PD11: JP1.52 MCU1.80 | length 20.2
  Top Layer w0.203: MCU1.80 105.232,80.075 106.483,78.824 106.483,69.653 105.689,68.859 105.689,66.624 105.08,66.015 v1(105.08,63.375)
PD12: JP1.53 MCU1.81 | length 16.9
  Top Layer w0.203: MCU1.81 105.531,80.575 106.886,79.219 106.886,69.294 106.375,68.783 v1(106.375,67.132)
PD13: JP1.54 MCU1.82 | length 21.7
  Top Layer w0.203: MCU1.82 105.742,81.075 107.29,79.527 107.29,69.127 106.985,68.823 106.985,65.557 106.35,64.922 v1(106.35,63.375)
PD14: JP1.44 MCU1.85 | length 37.8
  Top Layer w0.203: v1(99.949,63.375) 99.949,62.128 100.406,61.671 107.061,61.671 111.023,65.634 111.023,79.985 108.433,82.575 MCU1.85
PD15: JP1.43 MCU1.86 | length 20
  Top Layer w0.203: v1(100.025,67.132) 100.025,69.672 102.26,71.907 102.26,75.641 100.254,77.648 100.254,82.626 100.703,83.075 MCU1.86
PE0: JP2.18 MCU1.141 | length 7.5
  Top Layer w0.203: v1(83.439,103.505) 83.439,99.695 84.425,98.709 MCU1.141
PE1: JP2.19 MCU1.142 | length 12.1
  Top Layer w0.203: MCU1.142 83.925,98.639 82.887,99.676 82.887,105.62 84.443,107.176 84.671,107.176 v1(84.709,107.213)
PE2: JP2.14 MCU1.1 | length 9.5
  Top Layer w0.203: MCU1.1 80.55,96.552 80.95,96.952 v1(80.95,103.429)
PE3: JP2.13 MCU1.2 | length 15.5
  Top Layer w0.203: MCU1.2 80.524,93.601 79.573,93.601 79.373,93.8 79.373,97.788 80.34,98.755 80.34,104.877 80.975,105.512 v1(80.975,107.34)
PE4: JP2.12 MCU1.3 | length 11.9
  Top Layer w0.203: v1(79.68,103.429) 79.68,98.665 78.97,97.955 78.97,93.611 79.503,93.078 80.547,93.078 MCU1.3
PE5: JP2.11 MCU1.4 | length 16.6
  Top Layer w0.203: v1(79.705,107.264) 79.705,105.588 79.045,104.927 79.045,98.6 78.567,98.122 78.567,93.444 79.436,92.575 MCU1.4
PE6: JP2.10 MCU1.5 | length 13.3
  Top Layer w0.203: v1(78.384,103.429) 78.384,98.51 78.164,98.289 78.164,93.032 79.121,92.075 MCU1.5
PE7: JP1.30 MCU1.58 | length 12.3
  Top Layer w0.203: v1(91.135,63.375) 91.135,65.202 90.5,65.837 90.5,68.402 93.425,71.327 MCU1.58
PE8: JP1.29 MCU1.59 | length 8.2
  Top Layer w0.203: v1(91.11,67.132) 91.11,68.301 93.925,71.116 MCU1.59
PE9: JP1.31 MCU1.60 | length 7.9
  Top Layer w0.203: v1(92.405,67.132) 92.405,68.885 94.425,70.905 MCU1.60
PE10: JP1.32 MCU1.63 | length 12.3
  Top Layer w0.203: v1(92.38,63.375) 92.38,65.151 93.04,65.811 93.04,68.809 95.925,71.693 MCU1.63
PE11: JP1.33 MCU1.64 | length 8.2
  Top Layer w0.203: v1(93.675,67.132) 93.675,68.758 96.425,71.508 MCU1.64
PE12: JP1.34 MCU1.65 | length 12.2
  Top Layer w0.203: v1(93.675,63.375) 93.675,65.176 94.285,65.786 94.285,68.656 96.925,71.296 MCU1.65
PE13: JP1.35 MCU1.66 | length 8.1
  Top Layer w0.203: v1(94.945,67.132) 94.945,68.682 97.425,71.161 MCU1.66
PE14: JP1.36 MCU1.67 | length 12
  Top Layer w0.203: v1(94.971,63.375) 94.971,65.075 95.555,65.659 95.555,68.682 97.925,71.052 MCU1.67
PE15: JP1.37 MCU1.68 | length 8
  Top Layer w0.203: v1(96.241,67.132) 96.241,68.631 98.425,70.815 MCU1.68
PF0: JP2.7 MCU1.10 | length 20.8
  Top Layer w0.203: v1(77.114,107.34) 77.114,105.715 76.505,105.105 76.505,101.024 v1(77.152,100.377) ; v1(78.624,89.575) MCU1.10
  Bottom Layer w0.203: v1@77.14,100.355 77.14,91.059 v1(78.624,89.575)
PF1: JP2.6 MCU1.11 | length 17.9
  Top Layer w0.203: v1(77.724,89.154) 77.805,89.073 78.832,89.073 78.833,89.075 MCU1.11
  Bottom Layer w0.203: JP2.6 75.844,103.342 75.844,100.736 76.683,99.898 76.683,90.322 77.724,89.281 v1(77.724,89.154)
PF2: JP2.5 MCU1.12 | length 23.2
  Top Layer w0.203: v1(75.87,107.315) 75.87,105.766 75.26,105.156 75.26,99.338 v1(76.149,98.449) ; v1(77.196,88.575) 77.199,88.572 MCU1.12@80.55,88.572
  Bottom Layer w0.203: v1(76.149,98.449) 76.149,89.561 77.135,88.575 v1(77.196,88.575)
PF3: JP2.4 MCU1.13 | length 20.5
  Top Layer w0.203: v1@76.505,87.833 77.419,87.833 77.661,88.075 MCU1.13
  Bottom Layer w0.203: JP2.4 74.608,89.728 v1(76.502,87.834)
PF4: JP2.3 MCU1.14 | length 26.1
  Top Layer w0.203: v1(73.965,100.254) 73.965,105.156 74.6,105.791 v1(74.6,107.315) ; v1@76.454,86.893 77.47,86.893 78.152,87.575 MCU1.14
  Bottom Layer w0.203: v1(73.965,100.254) 73.965,89.51 76.359,87.116 76.359,87.056 76.456,86.959 v1(76.456,86.905)
PF5: JP2.2 MCU1.15 | length 24
  Top Layer w0.203: v1(74.27,86.309) 77.927,86.309 78.693,87.075 MCU1.15
  Bottom Layer w0.203: JP2.2 73.338,87.241 v1(74.27,86.309)
PF6: JP2.1 MCU1.18 | length 30.8
  Top Layer w0.203: v1(70.663,88.824) 70.663,102.895 73.33,105.562 v1@73.33,107.29 ; v1(73.912,85.575) MCU1.18
  Bottom Layer w0.203: v1(70.663,88.824) v1(73.912,85.575)
  other v1: 73.34,107.279
PF7: JP1.7 MCU1.19 | length 36.3
  Top Layer w0.203: v1(76.327,84.709) 76.327,84.785 76.617,85.075 MCU1.19
  Bottom Layer w0.203: v1(76.327,84.709) 74.295,84.709 73.431,83.845 73.431,80.01 70.104,76.683 70.104,66.015 71.12,64.999 76.53,64.999 77.148,65.616 JP1.7
PF8: JP1.8 MCU1.20 | length 37.2
  Top Layer w0.203: v1(70.688,66.522) 72.085,65.125 72.085,62.408 73.05,61.443 76.505,61.443 77.191,62.128 v1@77.191,63.317 ; v1(76.911,84.099) 77.387,84.575 MCU1.20
  Bottom Layer w0.203: v1(70.688,66.522) 70.688,76.697 73.835,79.843 73.835,83.588 74.346,84.099 v1(76.911,84.099)
  other v1: 77.191,63.375
PF9: JP1.5 MCU1.21 | length 29.1
  Top Layer w0.203: v1@78.105,83.845 78.335,84.075 MCU1.21
  Bottom Layer w0.203: JP1.5 75.846,67.244 75.846,65.889 75.463,65.507 72.542,65.507 71.247,66.802 71.247,76.505 74.295,79.553 74.295,80.033 v1(78.104,83.842)
PF10: JP1.6 MCU1.22 | length 26.6
  Top Layer w0.203: v1(75.946,63.375) 75.946,65.329 76.53,65.913 76.53,68.504 v1(77.114,69.088) ; MCU1.22 82.49,83.575 83.21,82.855 83.21,77.724 v1(81.128,75.641)
  Bottom Layer w0.203: v1(77.114,69.088) 79.045,69.088 81.128,71.171 v1(81.128,75.641)
PF11: JP1.21 MCU1.49 | length 8.3
  Top Layer w0.203: v1(86.03,67.132) 86.03,68.656 88.925,71.551 MCU1.49
PF12: JP1.24 MCU1.50 | length 12.3
  Top Layer w0.203: v1(87.351,63.375) 87.351,64.973 86.639,65.684 86.639,68.605 89.425,71.391 MCU1.50
PF13: JP1.23 MCU1.53 | length 8.6
  Top Layer w0.203: v1(87.3,67.132) 87.3,68.605 90.925,72.231 MCU1.53
PF14: JP1.26 MCU1.54 | length 12.5
  Top Layer w0.203: v1(88.57,63.375) 88.57,65.126 87.96,65.735 87.96,68.631 91.425,72.096 MCU1.54
PF15: JP1.25 MCU1.55 | length 8.5
  Top Layer w0.203: v1(88.57,67.132) 88.57,68.555 91.925,71.91 MCU1.55
PG0: JP1.28 MCU1.56 | length 12.4
  Top Layer w0.203: v1(89.84,63.375) 89.84,65.151 89.205,65.786 89.205,68.504 92.425,71.724 MCU1.56
PG1: JP1.27 MCU1.57 | length 8.3
  Top Layer w0.203: v1(89.865,67.132) 89.865,68.428 92.925,71.487 MCU1.57
PG2: JP1.42 MCU1.87 | length 41.1
  Top Layer w0.203: v1(98.73,63.375) 98.73,61.798 99.289,61.239 107.315,61.239 111.427,65.351 111.427,80.152 108.003,83.575 MCU1.87
PG3: JP1.41 MCU1.88 | length 21.4
  Top Layer w0.203: v1(98.679,67.132) 98.679,69.037 101.857,72.215 101.857,75.474 99.851,77.481 99.851,77.873 99.847,77.876 99.847,82.906 101.017,84.075 MCU1.88
PG4: JP1.40 MCU1.89 | length 44.2
  Top Layer w0.203: v1(97.485,63.375) 97.485,61.646 98.323,60.808 107.518,60.808 111.83,65.119 111.83,80.319 107.573,84.575 MCU1.89
PG5: JP2.51 MCU1.90 | length 28
  Top Layer w0.203: MCU1.90 105.497,85.075 108.991,88.57 108.991,98.146 105.74,101.397 105.74,105.054 105.08,105.715 v1(105.08,107.29)
PG6: JP2.52 MCU1.91 | length 23.2
  Top Layer w0.203: MCU1.91 105.426,85.575 108.588,88.737 108.588,97.507 105.004,101.092 v1(105.004,103.378)
PG7: JP2.49 MCU1.92 | length 26.7
  Top Layer w0.203: MCU1.92 105.356,86.075 108.185,88.904 108.185,96.672 104.445,100.413 104.445,105.004 103.835,105.613 v1(103.835,107.264)
PG8: JP2.50 MCU1.93 | length 22
  Top Layer w0.203: MCU1.93 105.286,86.575 107.782,89.071 107.782,96.053 103.81,100.025 v1(103.81,103.403)
PG9: JP2.30 MCU1.124 | length 7.8
  Top Layer w0.203: v1(91.11,103.505) 91.11,101.448 92.925,99.632 MCU1.124
PG10: JP2.29 MCU1.125 | length 11.9
  Top Layer w0.203: v1(91.084,107.29) 91.084,105.867 90.475,105.258 90.475,101.321 92.425,99.37 MCU1.125
PG11: JP2.28 MCU1.126 | length 7.8
  Top Layer w0.203: v1(89.865,103.429) 89.865,101.168 91.925,99.108 MCU1.126
PG12: JP2.15 MCU1.127 | length 18.5
  Top Layer w0.203: v1(83.693,105.258) 84.125,104.826 v1(84.125,100.203) ; v1@91.338,98.575 91.425,98.488 MCU1.127
  Bottom Layer w0.203: JP2.15 82.228,105.656 82.626,105.258 v1(83.693,105.258) ; v1(84.125,100.203) 85.115,99.212 90.754,99.212 v1(91.338,98.628)
PG13: JP2.16 MCU1.128 | length 14.7
  Top Layer w0.203: v1(90.399,98.577) 90.925,98.051 MCU1.128
  Bottom Layer w0.203: JP2.16 82.228,99.662 83.312,98.577 v1(90.399,98.577)
PG14: JP2.17 MCU1.129 | length 23.8
  Top Layer w0.203: v1(81.62,99.354) 81.62,108.697 82.067,109.144 83.134,109.144 83.49,108.788 v1(83.49,107.188) ; v1@89.992,97.942 90.425,97.51 MCU1.129
  Bottom Layer w0.203: v1@81.61,99.365 83.024,97.951 v1(89.985,97.951)
PG15: JP2.27 MCU1.132 | length 11.2
  Top Layer w0.203: MCU1.132 88.925,102.59 89.154,102.819 89.154,105.41 89.84,106.096 v1@89.84,107.29
  other v1: 89.844,107.275
SWCLK: MCU1.109 SWD-4.2 | length 45.4
  Top Layer w0.203: MCU1.109 100.425,94.329 98.654,92.558 98.654,77.495 100.933,75.216 100.933,73.247 100.533,72.847 v1(100.533,72.339)
  Bottom Layer w0.203: v1(100.533,72.339) 100.533,71.349 101.448,70.434 111.887,70.434 112.7,71.247 112.7,73.431 111.591,74.54 SWD-4.2
SWDIO: MCU1.105 SWD-4.1 | length 31.5
  Top Layer w0.203: v1(99.39,90.501) 99.39,77.329 101.336,75.383 v1@101.336,72.654 ; 101.481,92.575 MCU1.105
  Bottom Layer w0.203: v1(99.39,90.501) 99.427,90.538 99.427,90.741 v1(101.27,92.583) ; v1(101.332,72.658) 101.99,72 SWD-4.1
pads on no net: MCU1.106
copper on no net:
  other v2: 69.175,62.825 114.175,62.825 69.175,107.825 114.175,107.825

## Polygon pours and split planes (outlines as drawn)
GND on Top Layer "Top Layer-GND2" (solid, remove dead copper, pour order 13): 66.675,110.338 116.688,110.338 116.688,60.325 66.675,60.325
5V on Top Layer "TL5V" (solid, remove dead copper, pour order 12): 108.407,102.083 110.642,102.083 111.15,101.575 111.15,93.167 113.005,91.313 114.833,91.313 114.833,92.38 113.106,92.38 111.938,93.548 111.938,104.343 110.642,105.639 110.642,108.585 108.407,108.585
3.3V on Top Layer "Top Layer-3.3V" (solid, pour order 5): 112.014,83.566 112.014,89.865 111.049,89.903 111.049,83.566
no net on Top Layer "Top Layer-GND2" (solid, pour order 1): 109.271,105.054
GND on Bottom Layer "Top Layer-GND2" (solid, remove dead copper, pour order 8): 66.675,110.338 116.688,110.338 116.688,60.325 66.675,60.325
3.3V on Bottom Layer "BL-3.3V" (solid, pour order 6): 107.137,108.585 108.102,108.585 108.102,98.45 112.014,94.539 112.014,83.566 111.049,83.566 111.049,94.183 107.137,98.095
5V on Bottom Layer "Bottom Layer-5V" (solid, remove dead copper, pour order 0): 108.407,108.585 110.642,108.585 110.642,102.083 108.407,102.083

## Silkscreen, mask and mechanical layers (free items; w line width, h text height)
Top Overlay:
  text "3.3V" at 105.22,79.248 h0.76
  text "GND" at 105.855,76.708 h0.76
  text "SWCLK" at 104.331,74.168 h0.76
  text "SWDIO" at 104.458,71.628 h0.76
Mechanical 1:
  the board outline again, w0.254